# EAGLE board Power_Distro_Board_V3 (EAGLE 8.3.2)
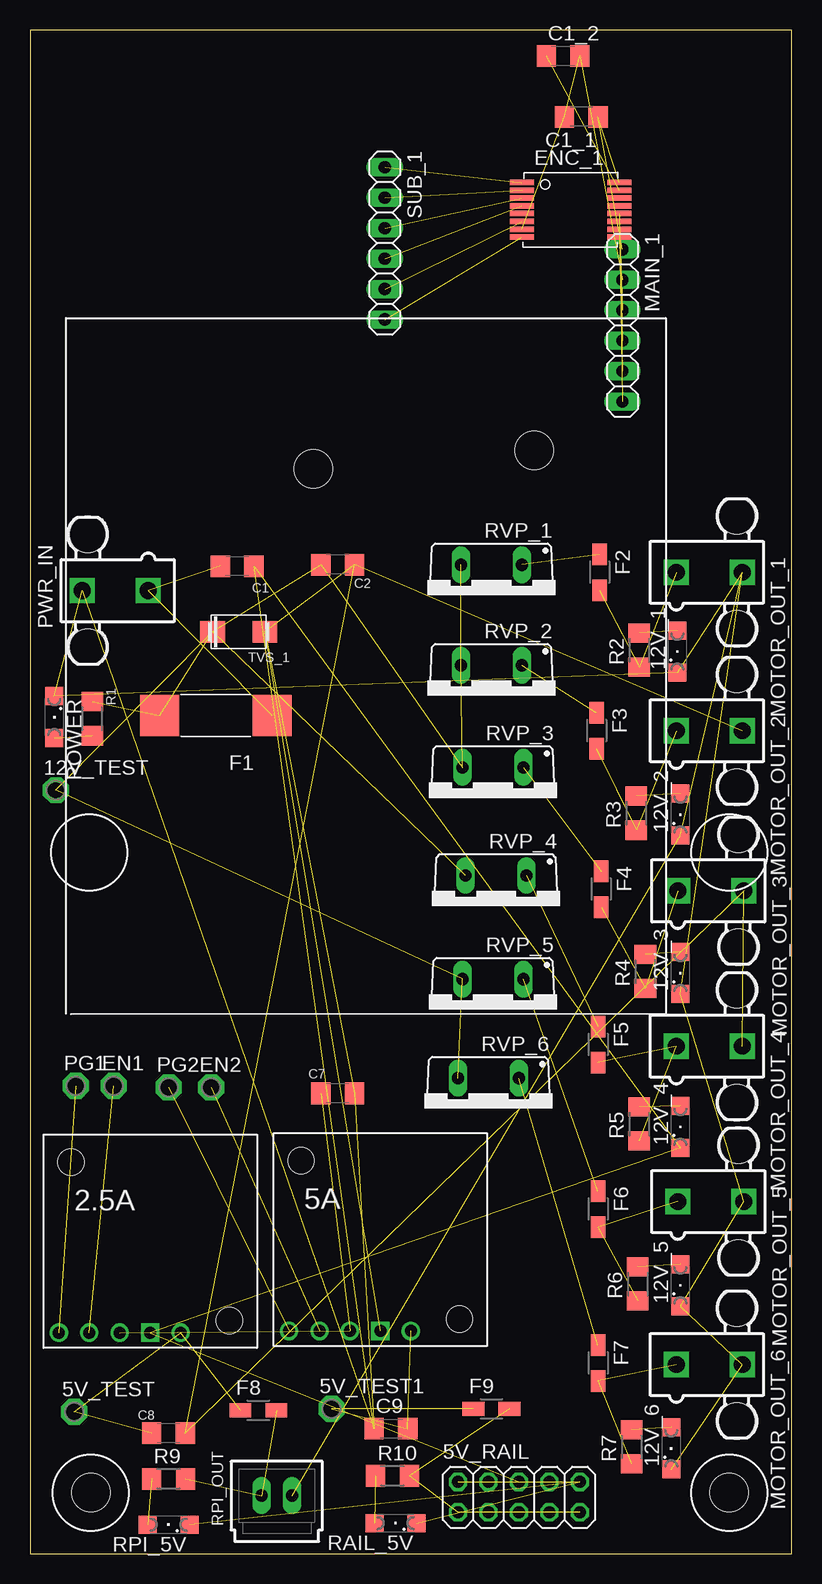
[diagram p0: board, top side]
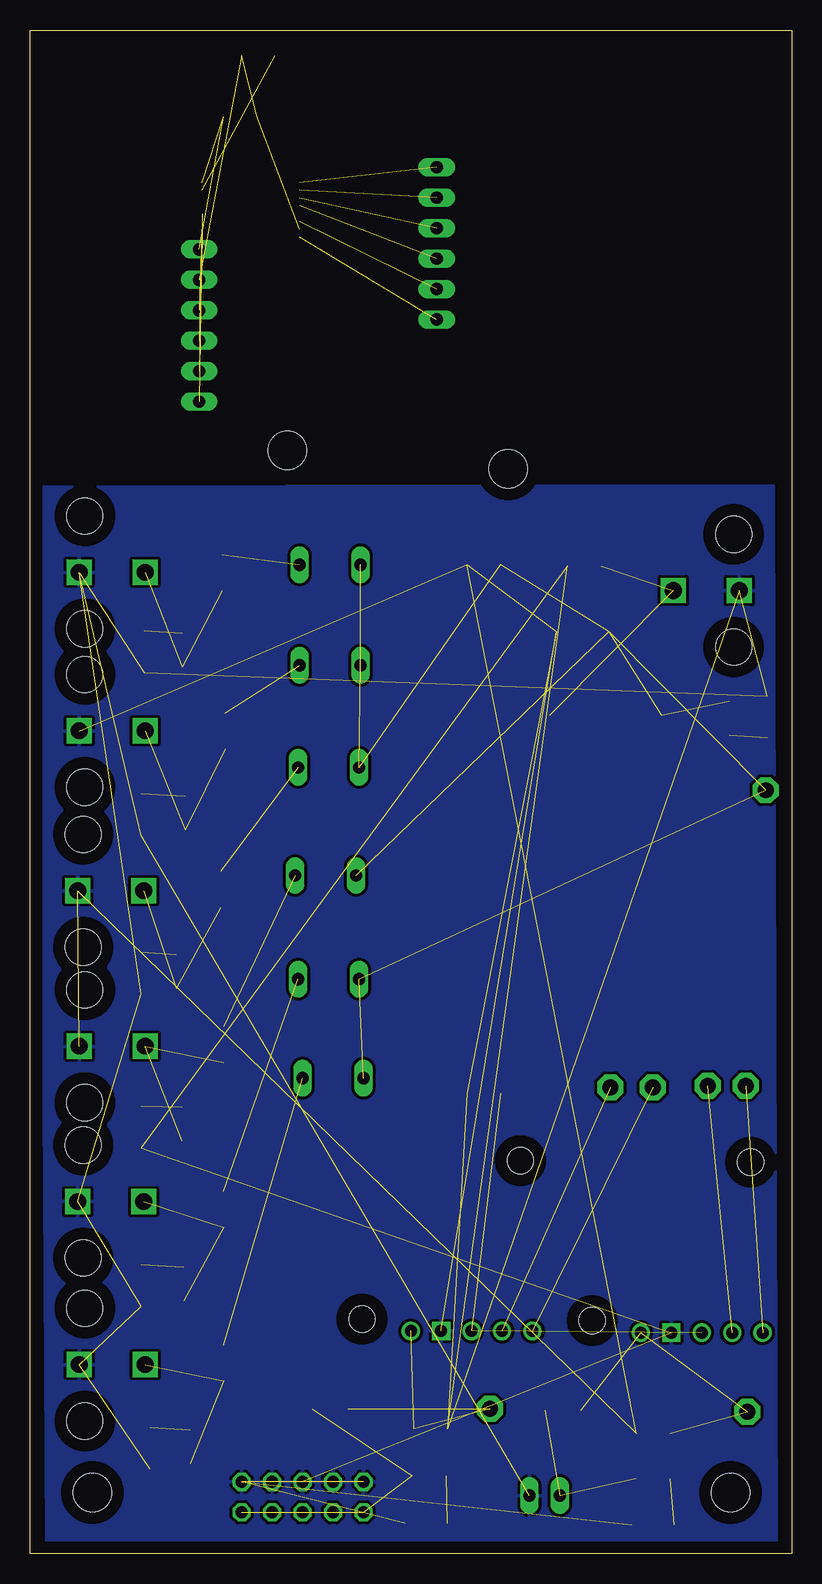
[diagram p1: board, bottom side, seen from below]

Size 63.5 x 127 mm. Coordinates in mm from the lower left corner, seen from the top.
Outline: 0,0 63.5,0 63.5,127 0,127 0,0
Copper layers (1*16): Top 0.035mm / dielectric 1.5mm / Bottom 0.035mm
Design rules "default *": minimum track width 6mil, minimum drill 0.35mm, track to track 6mil, track to pad 6mil, pad to pad 6mil, via to via 6mil, smd to smd 6mil, copper to edge 40mil, drill to drill 6mil, minimum pad ring 10mil, minimum via ring 8mil, stop-mask expansion 4mil, vias tented up to drill 0mil, thermal gap 10mil
Net classes: 0 default: width 0.025 mm, drill 0.254 mm, clearance 0.254 mm; 1 Power IN: width 4.801 mm; 2 Motor_OUT: width 4.801 mm; 3 3.3V_1A: width 0.305 mm; 4 5V_1A: width 0.305 mm; 5 12V_2A: width 0.813 mm
Holes 3.17 mm at 5.08,5.08 58.29,5.08 23.62,90.42 42.04,91.95

## Footprints (pad centres in the part's own frame; a part is rotated, then mirrored left to right if it is on the bottom)
SIP5 = drill 1: EN -5.08,-7.62; PG -7.62,-7.62; VIN -2.54,-7.62; VOUT 2.54,-7.62 | drill 1 square: GND 0,-7.62 | hole 2.184: 6.604,-6.604; -6.604,6.604
2X05 = drill 1.016 octagon: 1 -5.08,-1.27; 2 -5.08,1.27; 3 -2.54,-1.27; 4 -2.54,1.27; 5 0,-1.27; 6 0,1.27; 7 2.54,-1.27; 8 2.54,1.27; 9 5.08,-1.27; 10 5.08,1.27
P1-13 = drill 1.321 pad 2.159 octagon: TP 0,0
SML1206 = smd 1.5 x 1.5: A 1.75,0; C -1.75,0
C1206 = smd 1.6 x 1.8: 1 -1.4,0; 2 1.4,0
SSOP16 = smd 2 x 0.46: 1 -4.08,2.275; 2 -4.08,1.625; 3 -4.08,0.975; 4 -4.08,0.325; 5 -4.08,-0.325; 6 -4.08,-0.975; 7 -4.08,-1.625; 8 -4.08,-2.275; 9 4.08,-2.275; 10 4.08,-1.625; 11 4.08,-0.975; 12 4.08,-0.325; 13 4.08,0.325; 14 4.08,0.975; 15 4.08,1.625; 16 4.08,2.275
NANO = smd 3.25 x 3.43: VIN+ -4.675,0; VIN- 4.675,0
R1206W = smd 1.8 x 1.2: 1 -1.499,0; 2 1.499,0
1X06 = drill 1.016 long: 1 -6.35,0; 2 -3.81,0; 3 -1.27,0; 4 1.27,0; 5 3.81,0; 6 6.35,0
5566-2 = drill 1.4 square: 1 0,-2.75; 2 0,2.75 | hole 3: 4.7,2.29; -4.7,2.29
R1206 = smd 1.6 x 1.803: 1 -1.422,0; 2 1.422,0
70543-02 = drill 1.016 long: 1 -1.27,0; 2 1.27,0
TO220ACS = drill 1.016 long: A 2.54,-2.54; C -2.54,-2.54
DO-214AC = smd 2.083 x 1.778: 1 -2.184,0; 2 2.184,0

## Placement (x,y rotation side)
2.5A  POLOLU_5VREG  [SIP5]  10.03,26.04 0 top
5A  POLOLU_5VREG  [SIP5]  29.21,26.16 0 top
5V_RAIL  5V 5A  [2X05]  40.77,4.7 0 top
5V_TEST  TPPAD1-13  [P1-13]  3.68,11.81 0 top
5V_TEST1  TPPAD1-13  [P1-13]  25.15,12.06 0 top
12V_1  GREEN  [SML1206]  53.98,75.18 90 top
12V_2  GREEN  [SML1206]  54.23,61.59 90 top
12V_3  GREEN  [SML1206]  54.23,48.39 90 top
12V_4  GREEN  [SML1206]  54.23,35.56 90 top
12V_5  GREEN  [SML1206]  54.23,22.35 90 top
12V_6  GREEN  [SML1206]  53.47,8.76 90 top
12V_TEST  TPPAD1-13  [P1-13]  2.16,63.63 0 top
C1  150uF  [C1206]  17.27,82.3 180 top
C1_1  100nF  [C1206]  45.97,119.76 180 top
C1_2  10uF  [C1206]  44.45,124.84 0 top
C2  100uF  [C1206]  25.65,82.42 180 top
C7  10uF  [C1206]  25.65,38.35 180 top
C8  10uF  [C1206]  11.56,10.03 180 top
C9  10uF  [C1206]  30.1,10.41 0 top
EN1  TPPAD1-13  [P1-13]  6.99,38.99 0 top
EN2  TPPAD1-13  [P1-13]  15.11,38.86 0 top
ENC_1  ENCODER_AS5045B  [SSOP16]  45.09,112.01 0 top
F1  60VDC 50A  [NANO]  15.49,69.85 180 top
F2  60VDC 20A  [R1206W]  47.5,81.79 270 top
F3  60VDC 20A  [R1206W]  47.24,68.58 270 top
F4  60VDC 20A  [R1206W]  47.62,55.37 270 top
F5  60VDC 20A  [R1206W]  47.37,42.42 270 top
F6  60VDC 20A  [R1206W]  47.37,28.7 270 top
F7  60VDC 20A  [R1206W]  47.37,15.88 270 top
F8  60VDC 3A  [R1206W]  19.05,11.94 0 top
F9  60VDC 5A  [R1206W]  38.48,12.06 0 top
MAIN_1  [1X06]  49.4,102.36 270 top
MOTOR_OUT_1  5566-2  [5566-2]  56.64,81.79 270 top
MOTOR_OUT_2  5566-2  [5566-2]  56.64,68.58 270 top
MOTOR_OUT_3  5566-2  [5566-2]  56.77,55.24 270 top
MOTOR_OUT_4  5566-2  [5566-2]  56.64,42.29 270 top
MOTOR_OUT_5  5566-2  [5566-2]  56.77,29.34 270 top
MOTOR_OUT_6  5566-2  [5566-2]  56.64,15.75 270 top
PG1  TPPAD1-13  [P1-13]  3.81,38.99 0 top
PG2  TPPAD1-13  [P1-13]  11.56,38.86 0 top
POWER  GREEN  [SML1206]  2.03,69.72 270 top
PWR_IN  5566-2  [5566-2]  7.11,80.26 90 top
R1  500  [R1206]  5.21,69.6 270 top
R2  470  [R1206]  50.8,75.31 90 top
R3  470  [R1206]  50.55,61.72 90 top
R4  470  [R1206]  51.31,48.51 90 top
R5  470  [R1206]  50.8,35.81 90 top
R6  470  [R1206]  50.67,22.48 90 top
R7  470  [R1206]  50.16,8.89 90 top
R9  150  [R1206]  11.56,6.22 0 top
R10  150  [R1206]  30.23,6.48 0 top
RAIL_5V  GREEN  [SML1206]  30.48,2.54 180 top
RPI_5V  GREEN  [SML1206]  11.56,2.41 180 top
RPI_OUT  C-GRID-02-70543  [70543-02]  20.57,4.83 0 top
RVP_1  15V  [TO220ACS]  38.48,79.88 180 top
RVP_2  15V  [TO220ACS]  38.48,71.5 180 top
RVP_3  15V  [TO220ACS]  38.61,62.99 180 top
RVP_4  15V  [TO220ACS]  38.86,53.98 180 top
RVP_5  15V  [TO220ACS]  38.61,45.34 180 top
RVP_6  15V  [TO220ACS]  38.23,37.08 180 top
SUB_1  [1X06]  29.59,109.22 270 top
TVS_1  16V  [DO-214AC]  17.4,76.83 0 top

## Library data of the parts
2.5A 5A TVS_1 = POWER_DISTRO
5V_RAIL MAIN_1 SUB_1 = pinhead
5V_TEST 5V_TEST1 12V_TEST EN1 EN2 PG1 PG2 = testpad
12V_1-12V_6 POWER RAIL_5V RPI_5V = led
C1 C1_1 C1_2 C2 C7-C9 F2-F9 R1-R7 R9 R10 = resistor
ENC_1 F1 = minebot_PDR
MOTOR_OUT_1-MOTOR_OUT_6 PWR_IN = con-molex; OC_FARNELL: 1822072; OC_NEWARK: unknown
RPI_OUT = con-molex; OC_FARNELL: unknown; OC_NEWARK: unknown
RVP_1-RVP_6 = diode

## Nets
5V_REG: 2.5A.VOUT 5V_TEST.TP C8.2 F8.1
5V_REG1: F8.2 R9.2 RPI_OUT.1
5V_REG3: 5V_RAIL.1 5V_RAIL.3 5V_RAIL.5 5V_RAIL.7 5V_RAIL.9 F9.2 R10.2
12V_REG: 12V_TEST.TP C2.2 F1.VIN- R1.1 RVP_1.A RVP_2.A RVP_3.A RVP_4.A RVP_5.A RVP_6.A TVS_1.1
12V_REG_TVS: 2.5A.VIN 5A.VIN C7.2
A_1: ENC_1.3 SUB_1.3
B_1: ENC_1.4 SUB_1.4
CLK_1: ENC_1.10 MAIN_1.4
CSN_1: ENC_1.11 MAIN_1.3
DO_1: ENC_1.9 MAIN_1.5
GND: 2.5A.GND 5A.GND 5V_RAIL.2 5V_RAIL.4 5V_RAIL.6 5V_RAIL.8 5V_RAIL.10 12V_1.C 12V_2.C 12V_3.C 12V_4.C 12V_5.C 12V_6.C C1.1 C2.1 C7.1 C8.1 C9.1 MOTOR_OUT_1.2 MOTOR_OUT_2.2 MOTOR_OUT_3.2 MOTOR_OUT_4.2 MOTOR_OUT_5.2 MOTOR_OUT_6.2 POWER.C PWR_IN.2 RAIL_5V.C RPI_5V.C RPI_OUT.2 TVS_1.2
GND_1: C1_1.2 C1_2.2 ENC_1.7 MAIN_1.2
I_1: ENC_1.6 SUB_1.5
MAG_DEC_N_1: ENC_1.2 SUB_1.2
MAG_INC_N_1: ENC_1.1 SUB_1.1
N$1: POWER.A R1.2
N$2: 2.5A.PG PG1.TP
N$3: C1.2 F1.VIN+ PWR_IN.1
N$4: C1_2.1 ENC_1.15
N$5: F2.1 RVP_1.C
N$6: 2.5A.EN EN1.TP
N$7: F6.1 RVP_5.C
N$8: 5A.PG PG2.TP
N$9: 12V_1.A R2.2
N$10: R9.1 RPI_5V.A
N$11: R10.1 RAIL_5V.A
N$12: F2.2 MOTOR_OUT_1.1 R2.1
N$13: 12V_5.A R6.2
N$14: F3.1 RVP_2.C
N$15: 5A.EN EN2.TP
N$16: 12V_2.A R3.2
N$17: F6.2 MOTOR_OUT_5.1 R6.1
N$18: F3.2 MOTOR_OUT_2.1 R3.1
N$20: F7.1 RVP_6.C
N$21: 12V_6.A R7.2
N$22: F4.1 RVP_3.C
N$23: F7.2 MOTOR_OUT_6.1 R7.1
N$24: 12V_3.A R4.2
N$25: F4.2 MOTOR_OUT_3.1 R4.1
N$26: F5.1 RVP_4.C
N$27: 12V_4.A R5.2
N$28: F5.2 MOTOR_OUT_4.1 R5.1
N$32: 5A.VOUT 5V_TEST1.TP C9.2 F9.1
PDIO_1: ENC_1.8 SUB_1.6
PWM_1: ENC_1.12 MAIN_1.6
VIN_1: C1_1.1 ENC_1.16 MAIN_1.1

## Tracks (layer width: path | path; a pad name or v marks a point on that pad's centre or on a via)
5V_REG  (3 unrouted)
5V_REG1  (2 unrouted)
5V_REG3  (6 unrouted)
12V_REG  (10 unrouted)
12V_REG_TVS  (2 unrouted)
A_1  (1 unrouted)
B_1  (1 unrouted)
CLK_1  (1 unrouted)
CSN_1  (1 unrouted)
DO_1  (1 unrouted)
GND  (29 unrouted)
  pour Bottom: 1.52,89.03 1.27,0.64 62.1,0.89 62.61,88.9
GND_1  (3 unrouted)
I_1  (1 unrouted)
MAG_DEC_N_1  (1 unrouted)
MAG_INC_N_1  (1 unrouted)
N$1  (1 unrouted)
N$2  (1 unrouted)
N$3  (2 unrouted)
N$4  (1 unrouted)
N$5  (1 unrouted)
N$6  (1 unrouted)
N$7  (1 unrouted)
N$8  (1 unrouted)
N$9  (1 unrouted)
N$10  (1 unrouted)
N$11  (1 unrouted)
N$12  (2 unrouted)
N$13  (1 unrouted)
N$14  (1 unrouted)
N$15  (1 unrouted)
N$16  (1 unrouted)
N$17  (2 unrouted)
N$18  (2 unrouted)
N$20  (1 unrouted)
N$21  (1 unrouted)
N$22  (1 unrouted)
N$23  (2 unrouted)
N$24  (1 unrouted)
N$25  (2 unrouted)
N$26  (1 unrouted)
N$27  (1 unrouted)
N$28  (2 unrouted)
N$32  (3 unrouted)
PDIO_1  (1 unrouted)
PWM_1  (1 unrouted)
VIN_1  (2 unrouted)

## Text on the board
tNames: Team B : Aaron Basel David Edward Georgia
tDocu: **NOTE : / / There will be 27 DRC overlap errors. / Those are all vias within the GND pad of / the 3 linear voltage regulators included. / These are added on purpose, with thermals generated, / will help with power dissipation to the ground plane / at the bottom.